# Altium PCB MiniCar.PcbDoc
Units mil, origin at the board's own origin, x right, y up, seen from the top; angles counter-clockwise.
Board outline 826.77 x 708.66 mil, 2 copper layers (Top Layer, Bottom Layer); 33 components, 28 nets, 102 pads, 38 vias.
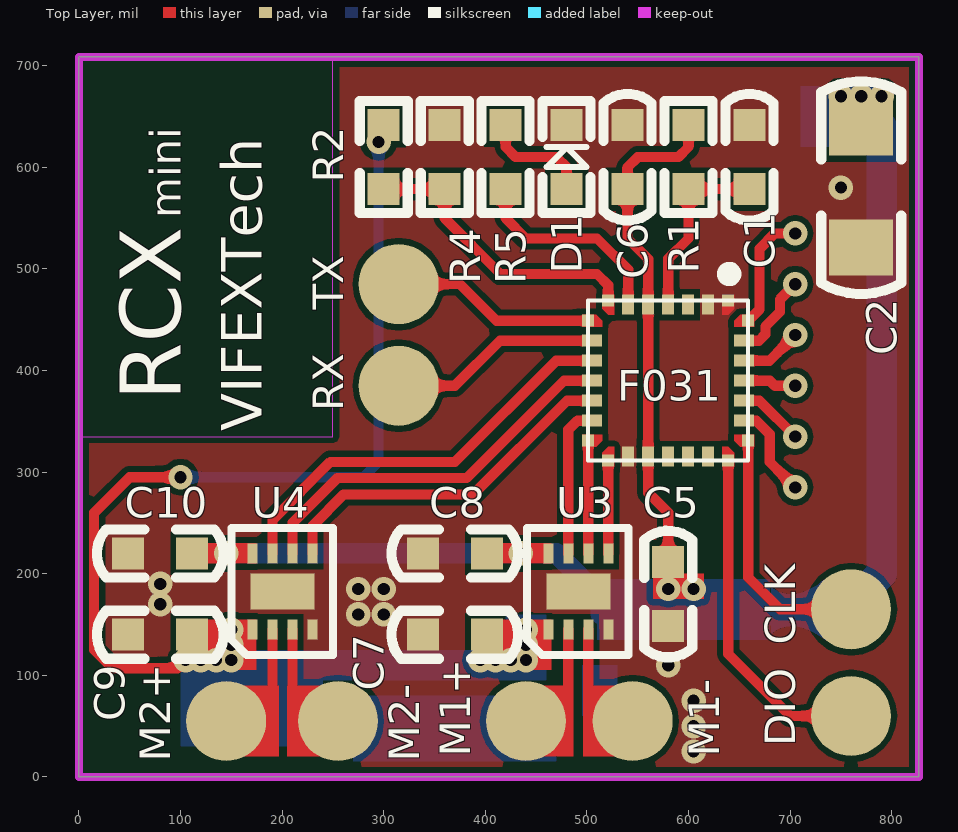
[diagram p0: Top Layer view]
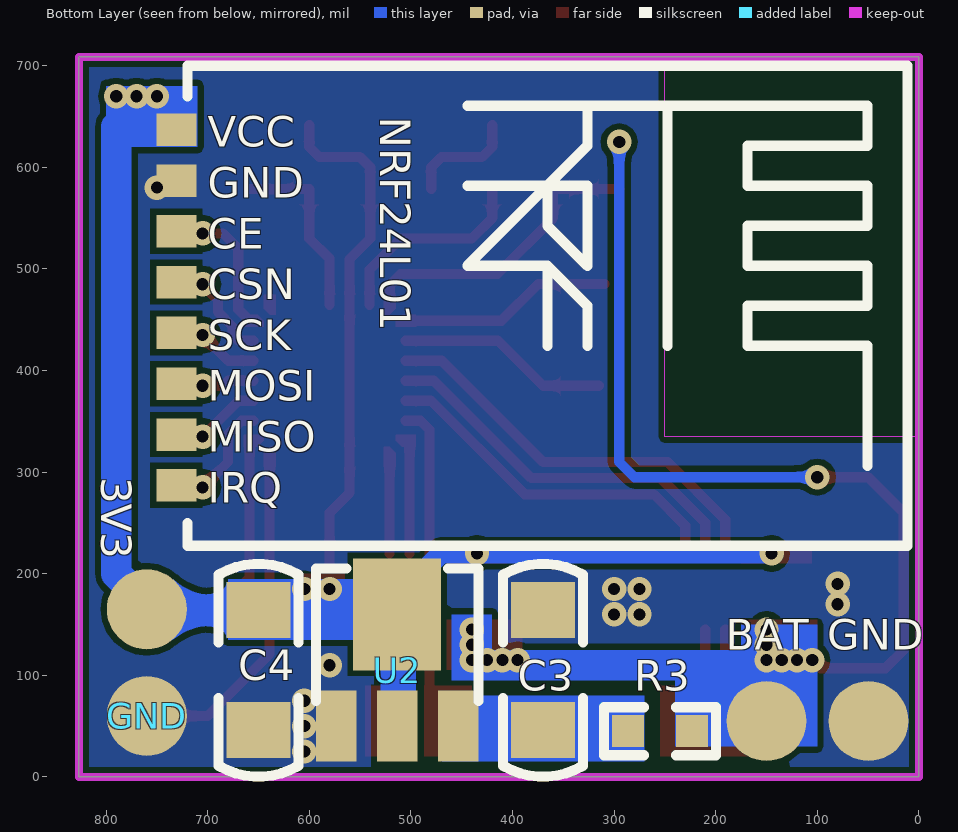
[diagram p1: Bottom Layer view, seen from below]
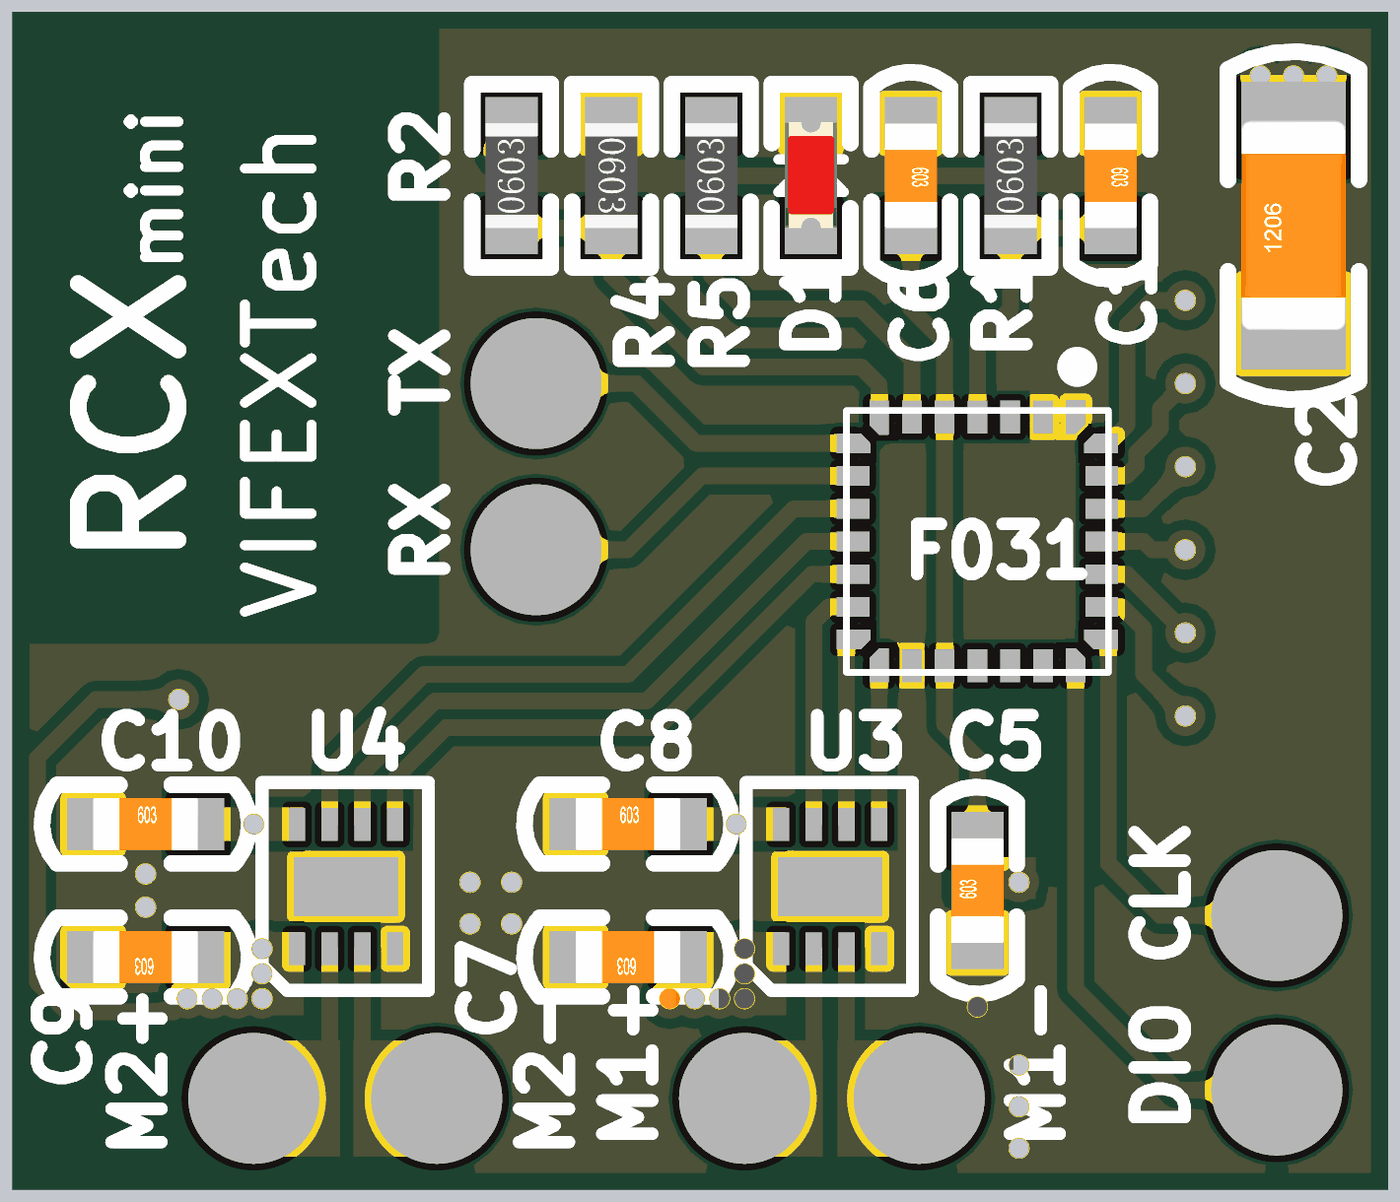
[diagram p2: 3D render of the assembled board from above, using the file's embedded part models]
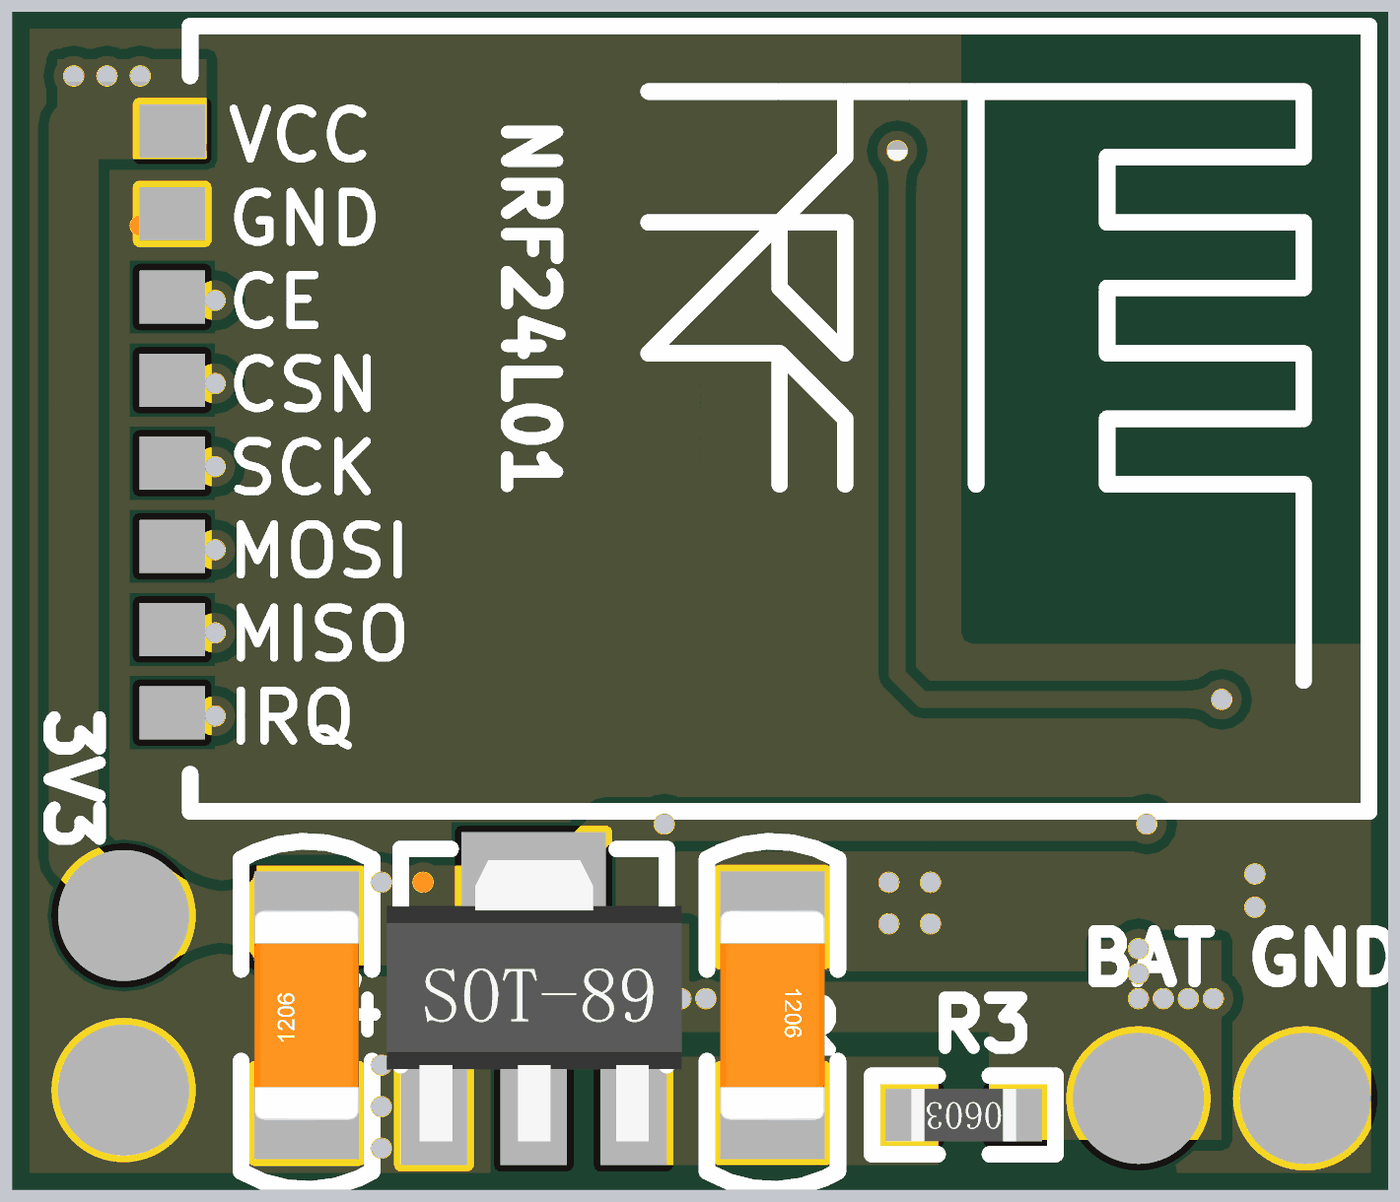
[diagram p3: 3D render of the assembled board from below, using the file's embedded part models]

## Layer stack, top to bottom
Top Solder: solder mask 0.4, Solder Resist, Dk 3.5
Top Layer: signal copper 1.4
Dielectric 1: dielectric 12.6, FR-4, Dk 4.8
Bottom Layer: signal copper 1.4
Bottom Solder: solder mask 0.4, Solder Resist, Dk 3.5

## Board outline
0,0 826.77,0 826.77,708.66 0,708.66

## Design rules (kind name [scope] priority, off if disabled: settings)
Clearance [All] p1: gap=6
HoleSize [All] p1 off: absolutevalues=TRUE maxlimit=100 minlimit=1 maxpercent=80.000 minpercent=20.000
HoleToHoleClearance [All] p1 off: gap=10 allowstackedmicrovias=TRUE
LayerPairs [All] p1 off: enforce=TRUE
MinimumSolderMaskSliver [All] p1 off: minsoldermaskwidth=10
NetAntennae [All] p1 off: netantennaetolerance=0
PlaneConnect [All] p1: planeconnectstyle=Direct reliefexpansion=20 reliefentries=4 reliefconductorwidth=10 reliefairgap=10
PolygonConnect [All] p1: connectstyle=Direct reliefconductorwidth=10 reliefentries=4 polygonreliefangle="90 Angle" airgapwidth=10
RoutingVias [All] p1: holewidth=28 width=50 viastyle="Through Hole" minholewidth=28 minwidth=50 maxholewidth=28 maxwidth=50
SilkToSilkClearance [All] p1 off: silktosilkclearance=10
SilkToSolderMaskClearance [IsPad] p1 off: minsilkscreentomaskgap=10 clearancetoexposedcopper=TRUE
SolderMaskExpansion [All] p1: expansion=4
Width [All] p1: maxlimit=100 minlimit=6 preferedwidth=6
22 further rules are at their usual default settings.

## Components (designator, comment, footprint, x,y, rotation, side; value= is the part's Value field where it differs from the comment)
3V3 "3V3" Pad_B 760,165 r180 bottom
BAT "BAT" Pad_B 150,55 r90 bottom
C1 "104" 电容_C0603 660,610 r270 top
C2 "22uF" 电容_C1206 770,580 r90 top
C3 "22uF" 电容_C1206 370,105 r270 bottom
C4 "22uF" 电容_C1206 650,105 r90 bottom
C5 "1uF" 电容_C0603 580,180 r90 top
C6 "1uF" 电容_C0603 540,610 r270 top
C7 "0.1uF" 电容_C0603 370,140 r180 top
C8 "0.1uF" 电容_C0603 370,220 r0 top
C9 "0.1uF" 电容_C0603 80,140 r180 top
C10 "0.1uF" 电容_C0603 80,220 r0 top
CLK "CLK" Pad_B 760,165 r90 top
D1 "red" LED_0603 480,610 r90 top
DIO "DIO" Pad_B 760,60 r90 top
F031 "STM32F031G6U6" ST主控_UFQFPN28 580,390 r270 top (schematic designator U1)
GND "GND" Pad_B 49.71,55 r90 bottom
GND "GND" Pad_B 760,60 r90 bottom (schematic designator GND2)
M1+ "M1-OUT1" Pad_B 440,55 r180 top
M1- "M1-OUT2" Pad_B 545,55 r180 top
M2+ "M2-OUT1" Pad_B 145,55 r180 top
M2- "M2-OUT2" Pad_B 255,55 r180 top
NRF24L01 "NRF_1" NRF-1 720,700 r270 bottom (schematic designator NRF1)
R1 "10K" 电阻_R0603 600,610 r90 top
R2 "10K" 电阻_R0603 300,610 r90 top
R3 "1R" 电阻_R0603 255,45 r0 bottom
R4 "10K" 电阻_R0603 360,610 r270 top
R5 "100" 电阻_R0603 420,610 r90 top
RX "PA3" Pad_B 314.75,385 r0 top (schematic designator PA3)
TX "PA2" Pad_B 314.75,485 r0 top (schematic designator PA2)
U2 "AMS1117" 稳压芯片_SOT-89 573.5,50 r180 bottom
U3 "DRV883x" WSON-8 521,145 r90 top
U4 "DRV883x" WSON-8 230,145 r90 top

## Footprints (in the part's own frame and the unit in brackets; to place one, negate y for a bottom-side part, rotate by r counter-clockwise, add the part's x,y. Pads: shape width x height; smd on the part's side, far side on the other; paste and mask are expansions set on the pad)
LED_0603 [mm]
  rect 0.8x0.8 smd: A(-0.8,0) K(0.8,0)
  silkscreen extent -1.4,-0.6 1.4,0.6, body extent -0.8,-0.4 0.82,0.4, height 0.6
NRF-1 [mm]
  rect 0.813x1 smd: 1(1.6,-0.275) 2(2.87,-0.275) 3(4.14,-0.275) 4(5.41,-0.275) 5(6.68,-0.275) 6(7.95,-0.275) 7(9.22,-0.275) 8(10.49,-0.275)
  silkscreen extent 0,0 12,18
Pad_B [mm]
  round 2 smd: 1(0,0)
ST主控_UFQFPN28 [mm]
  rect 0.3x0.3 smd: 1(-2.01,1.5) 7(-2,-1.5) 8(-1.5,-2) 14(1.5,-2) 15(2,-1.5) 21(2,1.5) 22(1.5,2) 28(-1.5,2)
  rect 0.5x0.3 smd: 2(-1.9,1) 3(-1.9,0.5) 4(-1.9,0) 5(-1.9,-0.5) 6(-1.9,-1) 16(1.9,-1) 17(1.9,-0.5) 18(1.9,0) 19(1.9,0.5) 20(1.9,1)
  rect 0.3x0.5 smd: 9(-1,-1.9) 10(-0.5,-1.9) 11(0,-1.9) 12(0.5,-1.9) 13(1,-1.9) 23(1,1.9) 24(0.5,1.9) 25(0,1.9) 26(-0.5,1.9) 27(-1,1.9)
  Top Layer region: -2.15,-1.35 -1.65,-1.35 -1.65,-1.5 -1.8,-1.65 -2.15,-1.65 -2.15,-1.35
  Top Layer region: -1.35,-2.15 -1.351,-1.65 -1.501,-1.65 -1.651,-1.801 -1.65,-2.151 -1.35,-2.15
  Top Layer region: 1.35,-1.65 1.5,-1.65 1.65,-1.8 1.65,-2.15 1.35,-2.15 1.35,-1.65
  Top Layer region: 1.65,-1.35 1.65,-1.5 1.8,-1.65 2.15,-1.65 2.15,-1.35 1.65,-1.35
  Top Layer region: -1.65,1.35 -1.65,1.5 -1.8,1.65 -2.15,1.65 -2.15,1.35 -1.65,1.35
  Top Layer region: -1.35,1.65 -1.5,1.65 -1.65,1.8 -1.65,2.15 -1.35,2.15 -1.35,1.65
  Top Layer region: 1.35,1.65 1.5,1.65 1.65,1.8 1.65,2.15 1.35,2.15 1.35,1.65
  Top Layer region: 1.65,1.35 1.65,1.5 1.8,1.65 2.15,1.65 2.15,1.35 1.65,1.35
  silkscreen extent -2.82,-2 2,2
WSON-8 [mm]
  rect 0.5x0.25 smd: 1(0,1.5) 2(0,1) 3(0,0.5) 4(0,0) 5(1.9,0) 6(1.9,0.5) 7(1.9,1) 8(1.9,1.5)
  rect 0.9x1.6 smd mask+0.102: 9(0.95,0.75)
  silkscreen extent -0.64,-0.51 2.54,2.03
电容_C0603 [mm]
  rect 0.8x0.8 smd: 1(-0.8,0) 2(0.8,0)
  silkscreen extent -1.58,-0.6 1.58,0.6, body extent -0.8,-0.4 0.8,0.4, height 0.3
电容_C1206 [mm]
  rect 1.4x1.6 smd: 1(-1.5,0) 2(1.5,0)
  silkscreen extent -2.66,-1 2.66,1, body extent -1.6,-0.8 1.6,0.8, height 1
电阻_R0603 [mm]
  rect 0.8x0.8 smd: 1(-0.8,0) 2(0.8,0)
  silkscreen extent -1.4,-0.6 1.4,0.6, body extent -0.8,-0.4 0.8,0.4, height 0.45
稳压芯片_SOT-89 [mil]
  rect 40x70 smd: 1(0,0) 2(60,0) 3(120,0)
  rect 86.61x110.24 smd: 2(60,110)
  silkscreen extent -20,25 140,155, body extent -28,-21 149,148, height 59

## Part data
3V3 BAT CLK DIO GND GND M1+ M1- M2+ M2- RX TX: library part Pad
C1 C2 C3 C4 C5 C6 C7 C8 C9 C10: library part cap
D1: library part LED
R1 R2 R3 R4 R5: library part Res

## Via types
v1: diameter 24, hole 12, Top Layer to Bottom Layer, tented both sides, 38 vias

## Nets (pads, with @x,y where several pads share a name; then routed paths per layer and width w, separated by ;. In a path a pad name is that pad's centre, name@x,y a point inside that pad or via, vN(x,y) a via of type N, cw(c..) or ccw(c..) an arc to the next point about the centre after c; other vN are vias at no path point)
3V3: 3V3.1 C2.2 C4.2 C5.2 C6.2 C8.2 C10.2 F031.5 F031.17 NRF24L01.1 R1.2 U2.2 U3.8 U4.8 | length 1493.8
  Top Layer w10: C5.2@580,210.46 580,260 560.32,279.68 F031.17 F031.5 560.32,509.68 540,530 C6.2 540,600 550,610 590,610 600,620 R1.2
  Bottom Layer w20: v1(145,220) v1(435,220) 470,220 513.5,176.5 U2.2@513.5,160
  Bottom Layer w30: C4.2 754.06,164.06 790,200 790,640
  other v1: 580,185 605,185 750,670 770,670 790,670
BAT: BAT.1 C7.1 C9.1 R2.2 R3.1 U3.1 U4.1 | length 856.5
  Top Layer w10: v1(100,295) 50,295 15,260 15,125 33,107 97,107 v1(105,115)
  Bottom Layer w10: v1(100,295) 280,295 295,310 v1(295,625) ; v1@105,125 105,130
  other v1: 120,115 135,115 150,115 395,115 410,115 425,115 440,115 150,130 440,130 150,145 440,145
BAT_DET: F031.7 R2.1 R4.2 | length 297.1
  Top Layer w10: R2.1@295,578.5 R4.2 360,550 415,495 510,495 520.94,484.06 F031.7
GND: C1.1 C2.1 C3.1 C4.1 C5.1 C6.1 C7.2 C8.1 C9.2 C10.1 D1.K F031.1 F031.2 F031.16 GND.1 NRF24L01.2 R4.1 U2.1 U3.4 U3.9 U4.4 U4.9
  other v1: 605,25 605,50 605,75 580,110 275,160 300,160 80,170 275,185 300,185 80,190 750,580
LED: F031.6 R5.1 | length 204.7
  Top Layer w10: R5.1 420,550 440,530 510,530 540.63,499.37 F031.6
M1-IN1: F031.14 U3.6 | length 111.1
  Top Layer w10: U3.6 F031.14
M1-IN2: F031.15 U3.5 | length 91.5
  Top Layer w10: U3.5@520.94,219.8 F031.15
M1-SLP: F031.13 U3.7 | length 149.1
  Top Layer w10: U3.7 481.63,341.63 490.63,350.63 F031.13
M2-IN1: F031.11 U4.6 | length 383.3
  Top Layer w10: U4.6 210.32,250.32 254.11,294.11 381.48,294.11 477.37,390 F031.11
M2-IN2: F031.12 U4.5 | length 353.7
  Top Layer w10: U4.5 230,247.37 260.74,278.11 388.11,278.11 480.32,370.32 F031.12
M2-SLP: F031.10 U4.7 | length 412.8
  Top Layer w10: U4.7 190.63,253.26 247.48,310.11 370.11,310.11 469.68,409.68 F031.10
NetC3_2: C3.2 R3.2 U2.3
NetD1_A: D1.A R5.2 | length 111.3
  Top Layer w10: R5.2 420,620 430,610 470,610 480,600 D1.A
NetM1+_1: M1+.1 U3.2 | length 65
  Top Layer w10: 481.63,80 U3.2
NetM1-_1: M1-.1 U3.3 | length 70
  Top Layer w10: 501.32,75 U3.3
NetM2+_1: M2+.1 U4.2 | length 65
  Top Layer w10: 190.63,80 U4.2
NetM2-_1: M2-.1 U4.3 | length 65
  Top Layer w10: 210.32,80 U4.3
NetPA2_1: F031.8 TX.1 | length 206.4
  Top Layer w10: TX.1@309.75,485 375,485 410.94,449.06 F031.8
NetPA3_1: F031.9 RX.1 | length 208.6
  Top Layer w10: RX.1@315,385 370,385 414.37,429.37 F031.9
NRF_CE: F031.28 NRF24L01.3 | length 116.8
  Top Layer w10: F031.28 670,460.31 670,520 685,535 v1(705,535)
NRF_CSN: F031.27 NRF24L01.4 | length 85
  Top Layer w10: F031.27 669.37,429.37 675.65,435.65 675.65,443.33 690,457.69 690,470 v1(705,485)
NRF_IRQ: F031.23 NRF24L01.8 | length 93.4
  Top Layer w10: F031.23 666.74,350.63 680,337.37 680,310 v1(705,285)
NRF_MISO: F031.24 NRF24L01.7 | length 64.8
  Top Layer w10: F031.24 669.68,370.32 v1(705,335)
NRF_MOSI: F031.25 NRF24L01.6 | length 52.3
  Top Layer w10: F031.25 680,390 685,385 v1(705,385)
NRF_SCK: F031.26 NRF24L01.5 | length 60.7
  Top Layer w10: F031.26 679.68,409.68 v1(705,435)
NRST: C1.2 F031.4 R1.1 | length 182
  Top Layer w10: F031.4 580,510 600,530 R1.1 C1.2
SWCLK: CLK.1 F031.22 | length 248.9
  Top Layer w10: F031.22 658.74,196.26 690,165 CLK.1
SWDIO: DIO.1 F031.21 | length 340.5
  Top Layer w10: F031.21 639.06,120.94 700,60 750.25,60 DIO.1@760,69.75
pads on no net: F031.3 F031.18 F031.19 F031.20

## Polygon pours and split planes (outlines as drawn)
GND on Top Layer "GND" (solid, remove dead copper, pour order 0): -60,740 880,740 900,720 890,710 890,-110 -70,-110 -100,-80
GND on Bottom Layer "GND" (solid, remove dead copper, pour order 2): -70,750 960,750 960,-140 950,-150 910,-110 -80,-110

## Keep-outs
Keep-Out Layer:
  rectangle: 0,335 250,708.66
  lines w7.87: 0,0 826.77,0 826.77,708.66 0,708.66 0,0

## Other copper
Top Layer:
  rectangle net NetM1-_1: 496,20 545,90
  rectangle net NetM1+_1: 440,20 487,90
  rectangle net NetM2-_1: 205,20 255,90
  rectangle net NetM2+_1: 145,20 197,90
  rectangle net BAT: 100,105 175,155
  rectangle net BAT: 390,105 465,155
  rectangle net 3V3: 565,175 615,200
  rectangle net 3V3: 105,210 175,230
  rectangle net 3V3: 405,210 465,230
Bottom Layer:
  rectangle net 3V3: 710,620 800,680
  rectangle net BAT: 160,30 240,105
  rectangle net NetC3_2: 270,15 470,80
  rectangle net 3V3: 495,60 530,110
  rectangle net 3V3: 510,135 680,195
  rectangle net BAT: 100,30 175,150
  rectangle net BAT: 165,95 460,125
  rectangle net BAT: 420,110 460,160

## Silkscreen, mask and mechanical layers (free items; w line width, h text height)
Top Overlay:
  text "mini" at 100,550 h30 r90
  text "RCX" at 100,370 h60 r90
  text "VIFEXTech" at 180,340 h40 r90
Mechanical 1:
  the board outline again, w7.87

## Text inside footprints (layer, text, board x,y; h text height)
NRF24L01: Bottom Overlay "VCC" at 700,620 h30; Bottom Overlay "GND" at 700,570 h30; Bottom Overlay "CE" at 700,520 h30; Bottom Overlay "CSN" at 700,470 h30; Bottom Overlay "SCK" at 700,420 h30; Bottom Overlay "MOSI" at 700,370 h30; Bottom Overlay "MISO" at 700,320 h30; Bottom Overlay "IRQ" at 700,270 h30